# Altium PCB KLogShield_MB_Rev1.PcbDoc
Units mil, origin at the board's own origin, x right, y up, seen from the top; angles counter-clockwise.
Board outline 2105 x 2710 mil, 2 copper layers (Top Layer, Bottom Layer); 44 components, 38 nets, 170 pads, 23 vias.
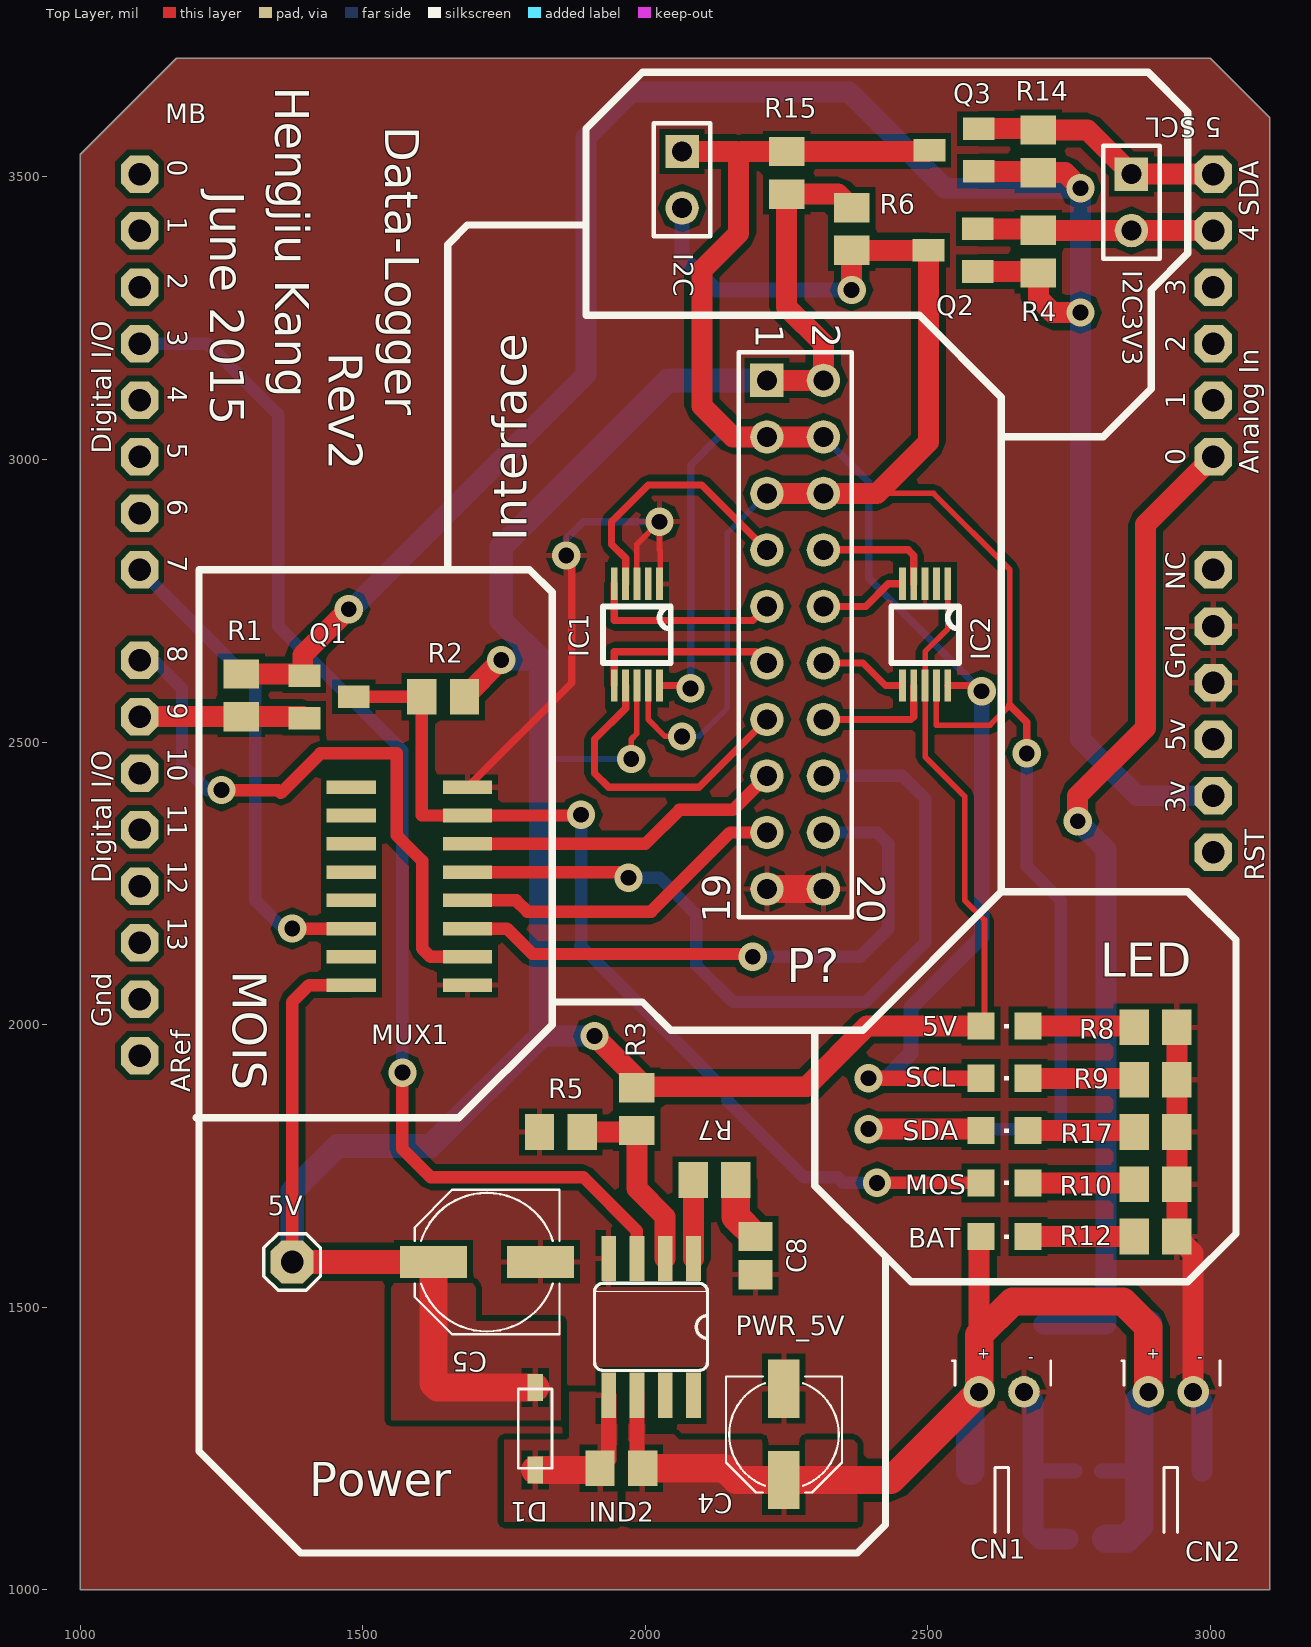
[diagram p0: Top Layer view]
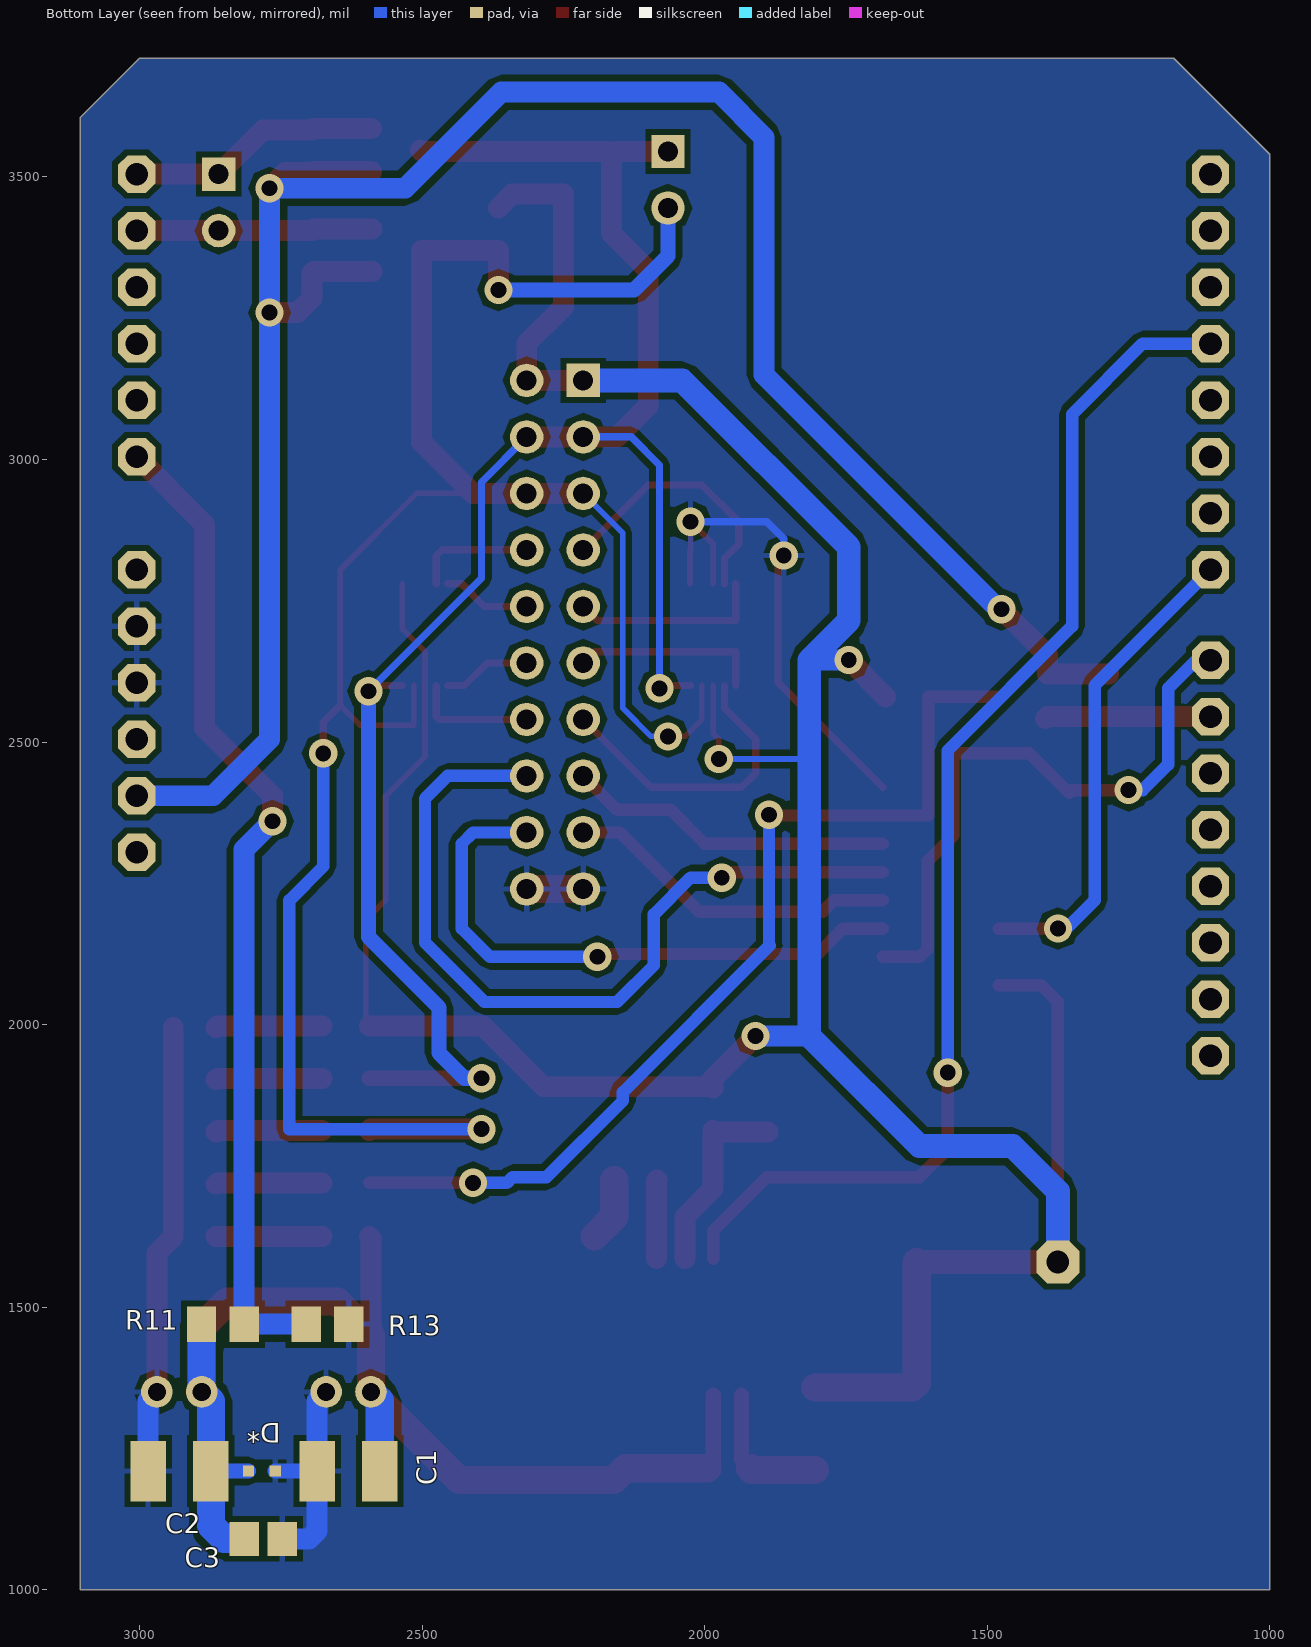
[diagram p1: Bottom Layer view, seen from below]

## Layer stack, top to bottom
Top Solder: solder mask 0.4, Solder Resist, Dk 3.5
Top Layer: signal copper 1.4
Dielectric 1: dielectric 12.6, FR-4, Dk 4.8
Bottom Layer: signal copper 1.4
Bottom Solder: solder mask 0.4, Solder Resist, Dk 3.5

## Board outline
1000,1000 3105,1000 3105,3605 3000,3710 1170,3710 1000,3540

## Design rules (kind name [scope] priority, off if disabled: settings)
Clearance [All] p1: gap=10
PolygonConnect [All] p1: connectstyle=Relief reliefconductorwidth=10 reliefentries=4 polygonreliefangle="90 Angle" airgapwidth=10
RoutingVias [All] p1: holewidth=28 width=50 viastyle="Through Hole" minholewidth=28 minwidth=50 maxholewidth=28 maxwidth=50
SolderMaskExpansion [All] p1: expansion=4
UnpouredPolygon [All] p1: allowunpoured=FALSE
Width [All] p1: maxlimit=50 minlimit=10 preferedwidth=32
29 further rules are at their usual default settings.

## Classes and differential pairs
net class Undefined: 3V3 5V ADC1_1 ADC1_2 ADC1_3 ADC1_4 ADC2_1 ADC2_2 ADC2_3 ADC2_4 BAT+ D7 D8 D9 D9_H GND MOS1_1 MOS1_2 MOS1_3 MOS1_4 Net5V_C NetBAT_C NetMOS_C NetMUX1_9 NetMUX1_10 NetMUX1_11 NetMUX1_12 NetMUX1_13 NetMUX1_15 NetR9_2 NetR17_2 SCL SDA
net class temperature: 3V3 5V SCL SCL3V3 SDA SDA3V3
net class pressure: 5V ADC1_1 ADC1_2 ADC1_3 ADC1_4 ADC2_1 ADC2_2 ADC2_3 ADC2_4 GND NetIC1_2 NetIC2_2 SCL SDA

## Components (designator, comment, footprint, x,y, rotation, side; value= is the part's Value field where it differs from the comment)
5V "GREEN" CHIPLED_0805 2635,1997.5 r270 top
5V "5V Probe" 1X01 1375,1580 r0 top
BAT "RED" CHIPLED_0805 2635,1625 r270 top
C1 "4.7uF" C1210 2630,1210 r0 bottom
C2 "4.7uF" C1210 2929,1210 r0 bottom
C3 "0.01uF" C0805 2781.54,1090 r180 bottom
C4 "47uF" PANASONIC_C 2245,1275 r270 top locked
C5 "220uF" PANASONIC_D 1720,1580 r180 top locked
C8 "100pF" C0805 2195,1591.54 r270 top locked
CN1 "TO_MB" JST-PH-2-THM-RA 2630.63,1350 r180 top
CN2 "TO_BAT" JST-PH-2-THM-RA 2930,1350 r180 top
D1 "Schottky" SOD-123 1805,1285 r270 top locked
D* "RB886G" RB886G 2760,1210 r0 bottom
I2C "I2C" HDR1X2 2065,3545 r270 top
I2C3V3 "I2C3V3" HDR1X2 2860,3505 r270 top
IC1 "ADS1115" 10-VSSOP 1925,2780 r270 top locked
IC2 "ADS1115" 10-VSSOP 2435,2780 r270 top locked
IND2 "Ind" M0805 1957.6,1215 r180 top locked
MB "SeeeduinoStalkerV3" SeeeduinoStalkrV3 3105,1005 r90 top locked
MOS "YELLOW" CHIPLED_0805 2635,1720 r270 top
MUX1 "74x153" SO16 1582.64,2245 r90 top
P? "Header 10X2" HDR2X10 2215,3140 r270 top
PWR_5V "LTC1308AB" SO08 2010,1465 r180 top locked
Q1 "BSS138" SOT23 1440,2580 r270 top
Q2 "BSS138" SOT23 2545,3370 r90 top
Q3 "BSS138" SOT23 2546.69,3547.4 r90 top
R1 "10K" M0805 1285,2583 r270 top
R2 "10K" M0805 1642.6,2580 r180 top
R3 "309K" M0805 1985,1850 r90 top
R4 "10K" M0805 2695.3,3367.4 r90 top
R5 "100K" M0805 1850,1810 r0 top
R6 "10K" M0805 2365,3408 r270 top
R7 "47K" M0805 2122.6,1725 r180 top locked
R8 "47K" M0805 2903,1995 r180 top
R9 "47K" M0805 2903,1902.5 r180 top
R10 "47K" M0805 2903,1717.5 r180 top
R11 "10K" M0805 2853,1470 r180 bottom
R12 "10K" M0805 2903,1625 r180 top
R13 "10K" M0805 2668,1470 r180 bottom
R14 "10K" M0805 2695,3545 r90 top
R15 "10K" M0805 2250,3507 r90 top
R17 "47K" M0805 2903,1810 r180 top
SCL "YELLOW" CHIPLED_0805 2635,1905 r270 top
SDA "YELLOW" CHIPLED_0805 2635,1812.5 r270 top

## Footprints (in the part's own frame and the unit in brackets; to place one, negate y for a bottom-side part, rotate by r counter-clockwise, add the part's x,y. Pads: shape width x height; smd on the part's side, far side on the other; paste and mask are expansions set on the pad)
1X01 [mil]
  oct 76x76 hole 40: 1(0,0)
  silkscreen extent -50,-50 50,50
10-VSSOP [mil]
  rect 57x12 smd mask+0: 1(0,100) 2(0,80) 3(0,60) 4(0,40) 5(0,20) 6(180,20) 7(180,40) 8(180,60) 9(180,80) 10(180,100)
  silkscreen extent 40,0 140,120
C0805 [mil]
  rect 52x60 smd: 1(-33.46,0) 2(34,0)
C1210 [mil]
  rect 63x107 smd: 1(-55.12,0) 2(56,0)
CHIPLED_0805 [mil]
  rect 48x48 smd: A(0,-41.34) C(0,42)
  silkscreen extent -4,0 4,8
HDR1X2 [mm] "Connector; Header; 2 Position"
  rect 1.5x1.5 hole 0.9: 1(0,0)
  round 1.5 hole 0.9: 2(2.54,0)
  silkscreen extent -1.27,-1.27 3.81,1.27
HDR2X10 [mm] "Connector; Header; 10x2 Position"
  rect 1.5x1.5 hole 0.9: 1(0,0)
  round 1.5 hole 0.9: 2(0,2.54) 3(2.54,0) 4(2.54,2.54) 5(5.08,0) 6(5.08,2.54) 7(7.62,0) 8(7.62,2.54) 9(10.16,0) 10(10.16,2.54) 11(12.7,0) 12(12.7,2.54) 13(15.24,0) 14(15.24,2.54) 15(17.78,0) 16(17.78,2.54) 17(20.32,0) 18(20.32,2.54) 19(22.86,0) 20(22.86,2.54)
  silkscreen extent -1.27,-1.27 24.13,3.81
JST-PH-2-THM-RA [mil]
  round 56 hole 32: 1(40,0) 2(-39.37,0)
  silkscreen extent -87,-55 87,249
M0805 [mil]
  rect 52x63 smd: 1(-37.4,0) 2(38,0)
PANASONIC_C [mil]
  rect 103x56 smd: +(81,0) -(-80.71,0)
  silkscreen extent -102,-102 103,103
PANASONIC_D [mil]
  rect 119x56 smd: +(95,0) -(-94.49,0)
  silkscreen extent -128,-128 128,128
RB886G [mm]
  rect 0.5x0.5 smd: A(0,0) C(1.2,0)
SeeeduinoStalkrV3 [mil]
  oct 66x66 hole 40: 3V(1400,100) 5V(1500,100) A0(2000,100) A1(2100,100) A2(2200,100) A3(2300,100) A4SDA(2400,100) A5SCL(2500,100) AREF(940,2000) D0(2500,2000) D1(2400,2000) D2(2300,2000) D3(2200,2000) D4(2100,2000) D5(2000,2000) D6(1900,2000) D7(1800,2000) D8(1640,2000) D9(1540,2000) D10(1440,2000) D11(1340,2000) D12(1240,2000) D13(1140,2000) GND(1040,2000) GND1(1700,100) GND2(1600,100) NC(1800,100) RESET(1300,100)
SO08 [mil]
  rect 26x80 smd: 1(-75,-121) 2(-25,-121) 3(25,-121) 4(75,-121) 5(75,121) 6(25,121) 7(-25,121) 8(-75,121)
  silkscreen extent -100,-77 100,77
SO16 [mil]
  rect 24x87 smd: 1(-175,-102.36) 2(-125,-102.36) 3(-75,-102.36) 4(-25,-102.36) 5(25,-102.36) 6(75,-102.36) 7(125,-102.36) 8(175,-102.36) 9(175,103) 10(125,103) 11(75,103) 12(25,103) 13(-25,103) 14(-75,103) 15(-125,103) 16(-175,103)
SOD-123 [mil]
  rect 48x28 smd: A(73,0) C(-72.83,0)
  silkscreen extent -70,-30 70,30
SOT23 [mil]
  rect 40x56 smd: 1(-37.4,-43.31) 2(38,-43.31) 3(0,44)

## Part data
5V BAT MOS SCL SDA: library part LEDCHIPLED_0805
5V: library part PINHD-1X1
C1 C2: library part C-USC1005
C3 C8: library part C-USC0805
C4 C5: library part CPOL-USD
CN1 CN2: library part JST_2PIN-THM-RA
D1: library part DIODESOD-123
I2C I2C3V3: library part "Header 2", "Header, 2-Pin"
P?: "Header, 10-Pin, Dual row"
Q1 Q2 Q3: library part MOSFET-NREFLOW
R1 R2 R3 R4 R5 R6 R7 R8 R9 R10 R11 R12 R13 R14 R15 R17: library part R-US_M0805

## Via types
v1: diameter 50, hole 28, Top Layer to Bottom Layer, 23 vias

## Nets (pads, with @x,y where several pads share a name; then routed paths per layer and width w, separated by ;. In a path a pad name is that pad's centre, name@x,y a point inside that pad or via, vN(x,y) a via of type N, cw(c..) or ccw(c..) an arc to the next point about the centre after c; other vN are vias at no path point)
3V3: MB.3V Q1.1 Q2.1 Q3.1 R1.1 R4.1 R14.1 | length 3929.2
  Top Layer w37: R1.1 1393.69,2620.4 1393.69,2653.69 v1(1475,2735) ; Q2.1 2692.7,3332.6 R4.1 2695.3,3285.3 2720.6,3260 v1(2770,3260) ; Q3.1 2692.6,3510 R14.1 2742.4,3507.6 v1(2770,3480)
  Bottom Layer w37: v1(1475,2735) 1480,2735 1895,3150 1895,3570 1975,3650 2360,3650 2530,3480 v1(2770,3480) v1(2770,3260) 2770,2505 2870,2405 MB.3V
5V: 5V.1 5V.A C5.+ D1.C IC1.8 IC2.1 IC2.8 MUX1.16 P?.1 P?.2 R2.1 R3.2 R6.1 R15.1 | length 6258.5
  Top Layer w10: v1(1975,2470) 1975,2505 1985,2515 IC1.8 ; IC2.1 2535,2700 2495,2660 IC2.8 2495,2474.04 2565,2404.04 2565,2220 2600,2185 2600,2003.84 5V.A
  Top Layer w22: 5V.1 1375,2040 1405,2070 MUX1.16
  Top Layer w37: R2.1 v1(1745,2645) ; R3.2 1985,1905 v1(1910,1980) 2000,1890 2285,1890 2392.5,1997.5 5V.A ; P?.1 P?.2 2315,3205 2250,3270 R15.1 2340.8,3469.6 R6.1
  Top Layer w42: 5V.1 C5.+
  Top Layer w50: C5.+ 1625,1365 1632.17,1357.83 D1.C
  Bottom Layer w10: 1815,2475 1820,2470 v1(1975,2470)
  Bottom Layer w37: v1(1745,2645) 1815,2645 ; 1815,1980 v1(1910,1980)
  Bottom Layer w42: 5V.1 1375,1705 1455,1785 1620,1785 1815,1980 1815,2475 1815,2645 1745,2715 1745,2845 2040,3140 P?.1
ADC1_1: IC1.4 P?.7 | length 469.9
  Top Layer w13: IC1.4 1965,2825 1940,2850 1940,2890 2005,2955 2100,2955 P?.7
ADC1_2: IC1.5 P?.9 | length 345.4
  Top Layer w13: IC1.5 1945,2715 2190,2715 P?.9
ADC1_3: IC1.6 P?.11 | length 338.3
  Top Layer w13: IC1.6 1945,2660 2195,2660 P?.11
ADC1_4: IC1.7 P?.13 | length 542.8
  Top Layer w13: IC1.7 1965,2560 1910,2505 1910,2445 1935,2420 2095,2420 P?.13
ADC2_1: IC2.4 P?.8 | length 214.1
  Top Layer w13: P?.8 2465,2840 2475,2830 IC2.4
ADC2_2: IC2.5 P?.10 | length 156.6
  Top Layer w13: P?.10 2390,2740 2430,2780 IC2.5
ADC2_3: IC2.6 P?.12 | length 156.6
  Top Layer w13: P?.12 2385,2640 2425,2600 IC2.6
ADC2_4: IC2.7 P?.14 | length 217.1
  Top Layer w13: P?.14 2470,2540 2475,2545 IC2.7
BAT+: BAT.A C1.1 C2.1 C3.1 C4.+ CN1.1 CN2.1 D*.C IND2.1 PWR_5V.6 R11.1 | length 2180.8
  Top Layer w27: PWR_5V.6 1985,1225 IND2.1
  Top Layer w37: 2590.63,1450.63 2590.63,1621.97 BAT.A
  Top Layer w50: IND2.1 2140,1215 2161,1194 C4.+ 2434.63,1194 CN1.1 2590.63,1450.63 2650,1510 2845,1510 2890,1465 CN2.1
  Bottom Layer w27: D*.C C2.1
  Bottom Layer w50: C1.1 2574.88,1334.25 CN1.1 ; C3.1 2850,1090 2873.88,1113.88 C2.1 2873.88,1333.88 CN2.1 2890.4,1350.4 R11.1
BAT_LEFT: MB.A0 R11.2 R13.1 | length 1764.7
  Top Layer w37: v1(2765,2360) 2765,2405 2885,2525 2885,2885 MB.A0
  Bottom Layer w37: R13.1 R11.2 2815,2310 v1(2765,2360)
D3: MB.D3 PWR_5V.3 | length 2212
  Top Layer w22: v1(1570,1915) 1570,1780 1620,1730 1890,1730 1985,1635 PWR_5V.3
  Bottom Layer w22: MB.D3 1225,3205 1350,3080 1350,2705 1570,2485 v1(1570,1915)
D4: MB.D4
D5: MB.D5
D6: MB.D6
D7: MB.D7 MUX1.14 | length 860.3
  Top Layer w22: v1(1375,2170) MUX1.14
  Bottom Layer w22: MB.D7 1310,2600 1310,2220 1360,2170 v1(1375,2170)
D8: MB.D8 MUX1.2 | length 1110.3
  Top Layer w22: v1(1250,2415) 1350,2415 1355,2410 1425,2480 1560,2480 1560,2335 1605,2290 1605,2135 1620,2120 MUX1.2
  Bottom Layer w22: MB.D8 1130,2645 1180,2595 1180,2460 1225,2415 v1(1250,2415)
D9: MB.D9 Q1.2 R1.2 | length 292.9
  Top Layer w37: MB.D9 R1.2 1393.69,2545 Q1.2
D9_H: MOS.A MUX1.7 Q1.3 R2.2 | length 1735.7
  Top Layer w22: Q1.3 R2.2 1604.6,2370.4 1605,2370 MUX1.7 1885,2370 v1(1886.25,2371.25) ; v1(2410,1720) MOS.A
  Bottom Layer w22: v1(1886.25,2371.25) 1886.25,2141.25 1885,2140 2145,1880 2145,1865 2280,1730 2340,1730 2350,1720 v1(2410,1720)
GND: C1.2 C2.2 C3.2 C4.- C5.- C8.2 CN1.2 CN2.2 D*.A IC1.1 IC1.3 IC2.3 MB.GND1 MB.GND2 MUX1.1 MUX1.8 P?.19 P?.20 PWR_5V.4 R5.1 R8.1 R9.1 R10.1 R12.1 R13.2 R17.1 | length 2232.6
  Top Layer w10: IC1.3 1985,2850 v1(2025,2890) 2025,2840 2026,2839 IC1.1@2026,2780
  Top Layer w13: MUX1.8 1870,2605 1870,2820 v1(1860,2830)
  Top Layer w37: R8.1 R9.1 R17.1 R10.1 R12.1 2969.37,1596.03 CN2.2
  Top Layer w50: P?.19 P?.20
  Bottom Layer w13: v1(1860,2830) 1860,2860 1890,2890 v1(2025,2890)
  Bottom Layer w27: C1.2 D*.A
  Bottom Layer w37: CN1.2 2686,1334 C1.2 2686,1104 2700,1090 C3.2 ; CN2.2 2985,1334.37 C2.2
MOS1_1: MUX1.6 P?.15 | length 579.7
  Top Layer w22: MUX1.6 2000,2320 2060,2380 2155,2380 P?.15
MOS1_2: MUX1.5 P?.16 | length 1453.1
  Top Layer w22: MUX1.5 1960,2270 v1(1970,2260)
  Bottom Layer w22: v1(1970,2260) 2025,2260 2090,2195 2090,2105 2155,2040 2390,2040 2495,2145 2495,2400 2455,2440 P?.16
MOS1_3: MUX1.4 P?.17 | length 596.3
  Top Layer w22: MUX1.4 1771.25,2220 1791.25,2200 2010,2200 2150,2340 P?.17
MOS1_4: MUX1.3 P?.18 | length 1059.7
  Top Layer w22: MUX1.3 1755,2170 1800,2125 2185,2125 v1(2190,2120)
  Bottom Layer w22: v1(2190,2120) 2380,2120 2430,2170 2430,2320 2410,2340 P?.18
Net5V_C: 5V.C R8.2 | length 189
  Top Layer w37: 5V.C 2862.5,1997.5 R8.2
NetBAT_C: BAT.C R12.2 | length 188
  Top Layer w37: BAT.C R12.2
NetC8_1: C8.1 R7.1 | length 114.5
  Top Layer w50: R7.1 2160,1660 C8.1
NetD1_A: D1.A IND2.2 PWR_5V.5 | length 251.2
  Top Layer w27: IND2.2 1935,1230.4 PWR_5V.5
  Top Layer w50: D1.A 1916.6,1212 IND2.2
NetMOS_C: MOS.C R10.2 | length 189
  Top Layer w37: MOS.C 2862.5,1720 R10.2
NetPWR_5V_1: PWR_5V.1 R7.2 | length 139.2
  Top Layer w37: R7.2 2085,1724.6 PWR_5V.1
NetPWR_5V_2: PWR_5V.2 R3.1 R5.2 | length 345.4
  Top Layer w37: R5.2 1982.4,1810 R3.1 1985,1710 2035,1660 PWR_5V.2
NetR9_2: R9.2 SCL.C | length 189
  Top Layer w37: SCL.C 2862.5,1905 R9.2
NetR17_2: R17.2 SDA.C | length 189
  Top Layer w37: SDA.C 2862.5,1812.5 R17.2
SCL: I2C.1 IC1.10 IC2.10 P?.3 P?.4 Q3.3 R15.2 SCL.A | length 3374.5
  Top Layer w13: IC1.10 2075,2600 v1(2080,2595) ; IC2.10 2585,2600 v1(2595,2590)
  Top Layer w27: v1(2395,1905) SCL.A
  Top Layer w37: I2C.1 2160,3545 2165,3540 ; P?.4 P?.3 2155,3040 2100,3095 2100,3335 2165,3400 2165,3540 ; Q3.3 2500.29,3545 R15.2 2170,3545 2165,3540
  Bottom Layer w13: v1(2080,2595) 2080,2990 2130,3040 P?.3 ; P?.4 2395,2960 2395,2790 v1(2595,2590)
  Bottom Layer w27: v1(2395,1905) 2425,1905 2470,1950 2470,2030 2595,2155 v1(2595,2590)
SCL3V3: I2C3V3.1 MB.A5SCL Q3.2 R14.2 | length 448.3
  Top Layer w37: Q3.2 2692.6,3585.4 R14.2 2782,3583 I2C3V3.1 MB.A5SCL
SDA: I2C.2 IC1.9 IC2.9 P?.5 P?.6 Q2.3 R6.2 SDA.A | length 3993.1
  Top Layer w10: IC1.9 2005,2540 2035,2510 v1(2065,2510) ; 2410,2940 2510,2940 2645,2805 2645,2565 2610,2530 2515,2530 IC2.9
  Top Layer w13: 2645,2565 2675,2535 v1(2675,2480)
  Top Layer w37: P?.5 P?.6 2410,2940 2501,3031 Q2.3 R6.2 v1(2365,3300) ; v1(2395,1815) 2591.16,1815 SDA.A
  Bottom Layer w10: v1(2065,2510) 2095,2510 2145,2560 2145,2870 P?.5
  Bottom Layer w22: v1(2395,1815) 2735,1815 2735,2220 2675,2280 v1(2675,2480)
  Bottom Layer w27: I2C.2 2065,3360 2125,3300 v1(2365,3300)
SDA3V3: I2C3V3.2 MB.A4SDA Q2.2 R4.2 | length 417.9
  Top Layer w37: Q2.2 2692.7,3408 R4.2 2859.6,3405.4 I2C3V3.2 MB.A4SDA
pads on no net: IC1.2 IC2.2 MB.5V MB.A1 MB.A2 MB.A3 MB.AREF MB.D0 MB.D1 MB.D2 MB.D10 MB.D11 MB.D12 MB.D13 MB.GND MB.NC MB.RESET MUX1.9 MUX1.10 MUX1.11 MUX1.12 MUX1.13 MUX1.15 PWR_5V.7 PWR_5V.8

## Polygon pours and split planes (outlines as drawn)
GND on Top Layer "GND_Plane" (solid, remove dead copper, pour order 12): 1000,1000 3105,1000 3105,3605 3000,3710 1170,3710 1000,3540
5V on Top Layer "GND_Plane" (solid, remove dead copper, pour order 6): 1550,1580 1550,1300 1850,1300 1850,1475 1700,1475 1700,1580
NetD1_A on Top Layer "GND_Plane" (solid, remove dead copper, pour order 4): 1950,1300 1950,1120 1750,1120 1750,1265 1860,1265 1865,1270 1865,1350 1950,1350
BAT+ on Top Layer "GND_Plane" (solid, remove dead copper, pour order 2): 1970,1300 1970,1270 1965,1257.93 1965,1120 2375,1120 2375,1265 2060,1265 2050,1275 2000,1275 2000,1300
GND on Bottom Layer "GND_Plane" (solid, remove dead copper, pour order 10): 1000,1000 3105,1000 3105,3605 3000,3710 1170,3710 1000,3540

## Silkscreen, mask and mechanical layers (free items; w line width, h text height)
Top Overlay:
  lines w13: 1650,2805 1650,3380 1685,3415 1895,3415 ; 1835,2040 1995,2040 2045,1990 2385,1990 2630,2235 ; 2300,1990 2300,1715 2425,1590 ; 2630,3040 2810,3040 2895,3125 2895,3300 2960,3365 2960,3615 2890,3685 1995,3685 1895,3585 1895,3255 2485,3255 2630,3110 2630,2235 ; 1210,1840 1210,1245 1390,1065 2375,1065 2425,1115 2425,1590 ; 1210,1840 1210,2805 1795,2805 1835,2765 1835,2000 1670,1835 1205,1835 1210,1840 ; 2425,1590 2470,1545 2960,1545 3045,1630 3045,2150 2960,2235 2630,2235
  text "Hengjiu Kang" at 1345,3660 h60 r270
  text "Data-Logger" at 1540,3590.02 h60 r270
  text "June 2015" at 1230,3475 h60 r270
  text "Rev2" at 1440,3190 h60 r270
  text "Interface" at 1790,2855 h60 r90
  text "MOIS" at 1270,2095 h60 r270
  text "LED" at 2805,2085 h60
  text "Power" at 1405,1165 h60

## Text inside footprints (layer, text, board x,y; h text height)
CN1: Top Overlay "+" at 2610.63,1432.52 h34 r180; Top Overlay "-" at 2686.89,1424.65 h34 r180
CN2: Top Overlay "+" at 2910,1432.52 h34 r180; Top Overlay "-" at 2986.26,1424.65 h34 r180
MB: Top Overlay "Digital I/O" at 1055,3010 h34 r90; Top Overlay "Digital I/O" at 1055,2250 h34 r90; Top Overlay "0" at 1155,3530 h34 r270; Top Overlay "1" at 1155,3430 h34 r270; Top Overlay "2" at 1155,3330 h34 r270; Top Overlay "3" at 1155,3230 h34 r270; Top Overlay "4" at 1155,3130 h34 r270; Top Overlay "5" at 1155,3030 h34 r270; Top Overlay "6" at 1155,2930 h34 r270; Top Overlay "7" at 1155,2830 h34 r270; Top Overlay "8" at 1155,2670 h34 r270; Top Overlay "9" at 1155,2570 h34 r270; Top Overlay "10" at 1155,2490 h34 r270; Top Overlay "11" at 1155,2390 h34 r270; Top Overlay "12" at 1155,2290 h34 r270; Top Overlay "13" at 1155,2190 h34 r270; Top Overlay "Gnd" at 1055,1995 h34 r90; Top Overlay "ARef" at 1195,1880 h34 r90; Top Overlay "5 SCL" at 3020,3605 h34 r180; Top Overlay "4 SDA" at 3085,3385 h34 r90; Top Overlay "3" at 2955,3290 h34 r90; Top Overlay "2" at 2955,3190 h34 r90; Top Overlay "1" at 2955,3090 h34 r90; Top Overlay "0" at 2955,2990 h34 r90; Top Overlay "Analog In" at 3085,2975 h34 r90; Top Overlay "NC" at 2955,2769 h34 r90; Top Overlay "Gnd" at 2955,2611 h34 r90; Top Overlay "5v" at 2955,2484 h34 r90; Top Overlay "3v" at 2955,2374 h34 r90; Top Overlay "RST" at 3095,2255 h34 r90
P?: Top Overlay "20" at 2375,2265 h50 r270; Top Overlay "19" at 2150,2180 h50 r90; Top Overlay "1" at 2195,3240 h50 r270; Top Overlay "2" at 2295,3240 h50 r270